# Altium PCB DVT-Atlas-Driver-HT.PcbDoc
Units mm, origin at the board's own origin, x right, y up, seen from the top; angles counter-clockwise.
Board outline 95 x 50 mm, 2 copper layers (Top Layer, Bottom Layer); 36 components, 26 nets, 115 pads, 5 vias.
Unrouted connection lines stored in the file: 20.
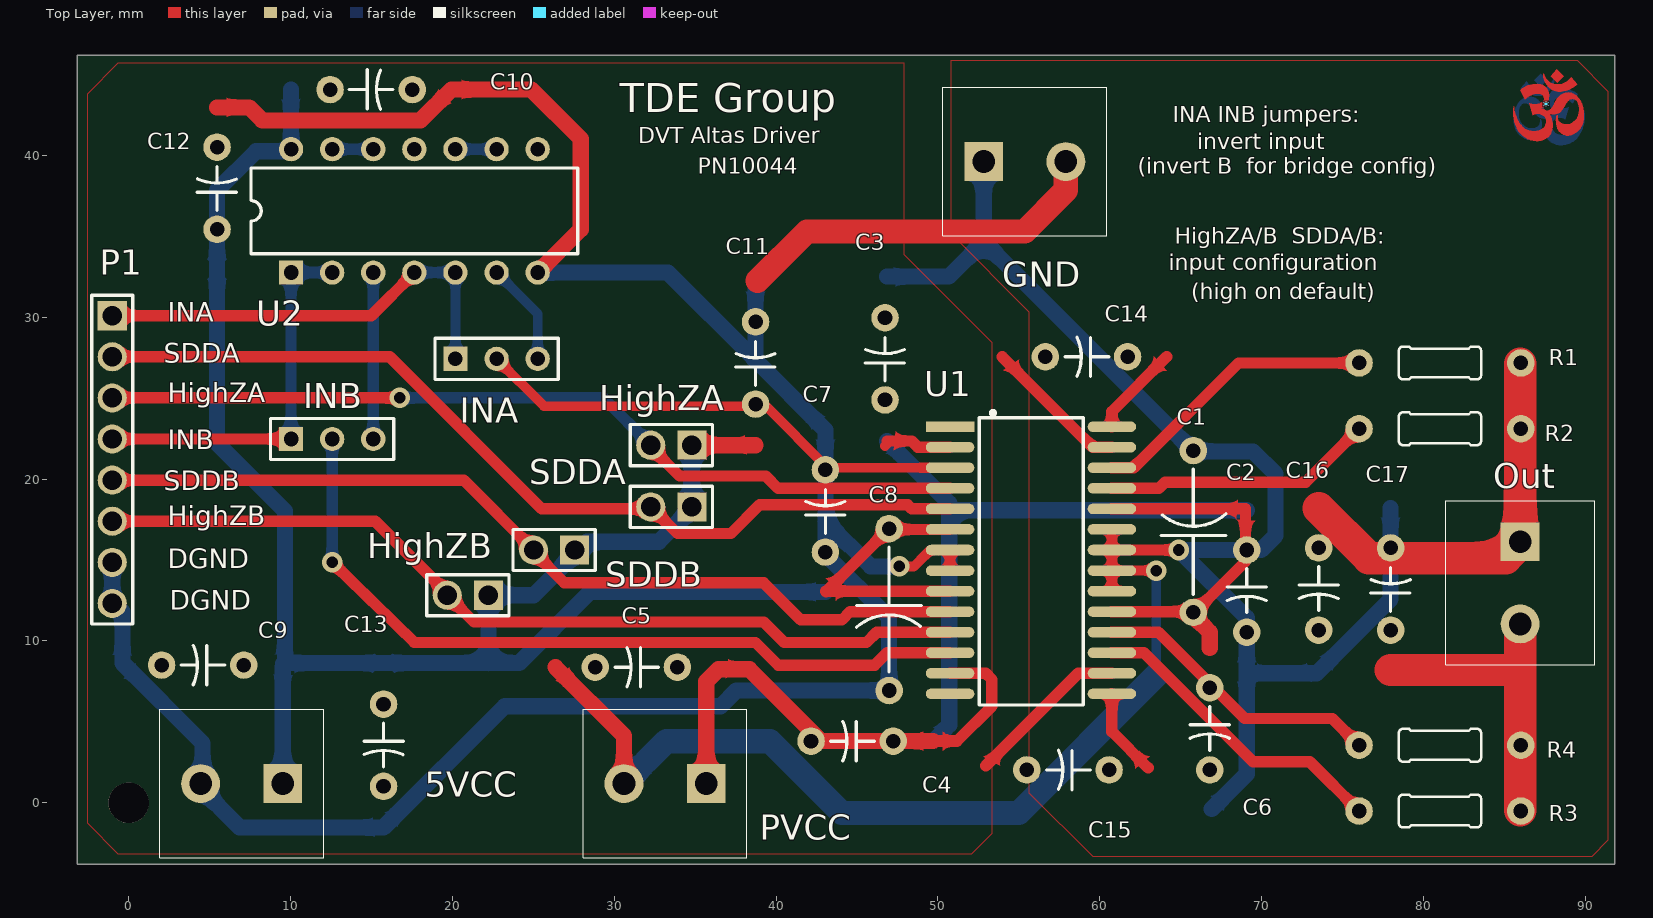
[diagram p0: Top Layer view]
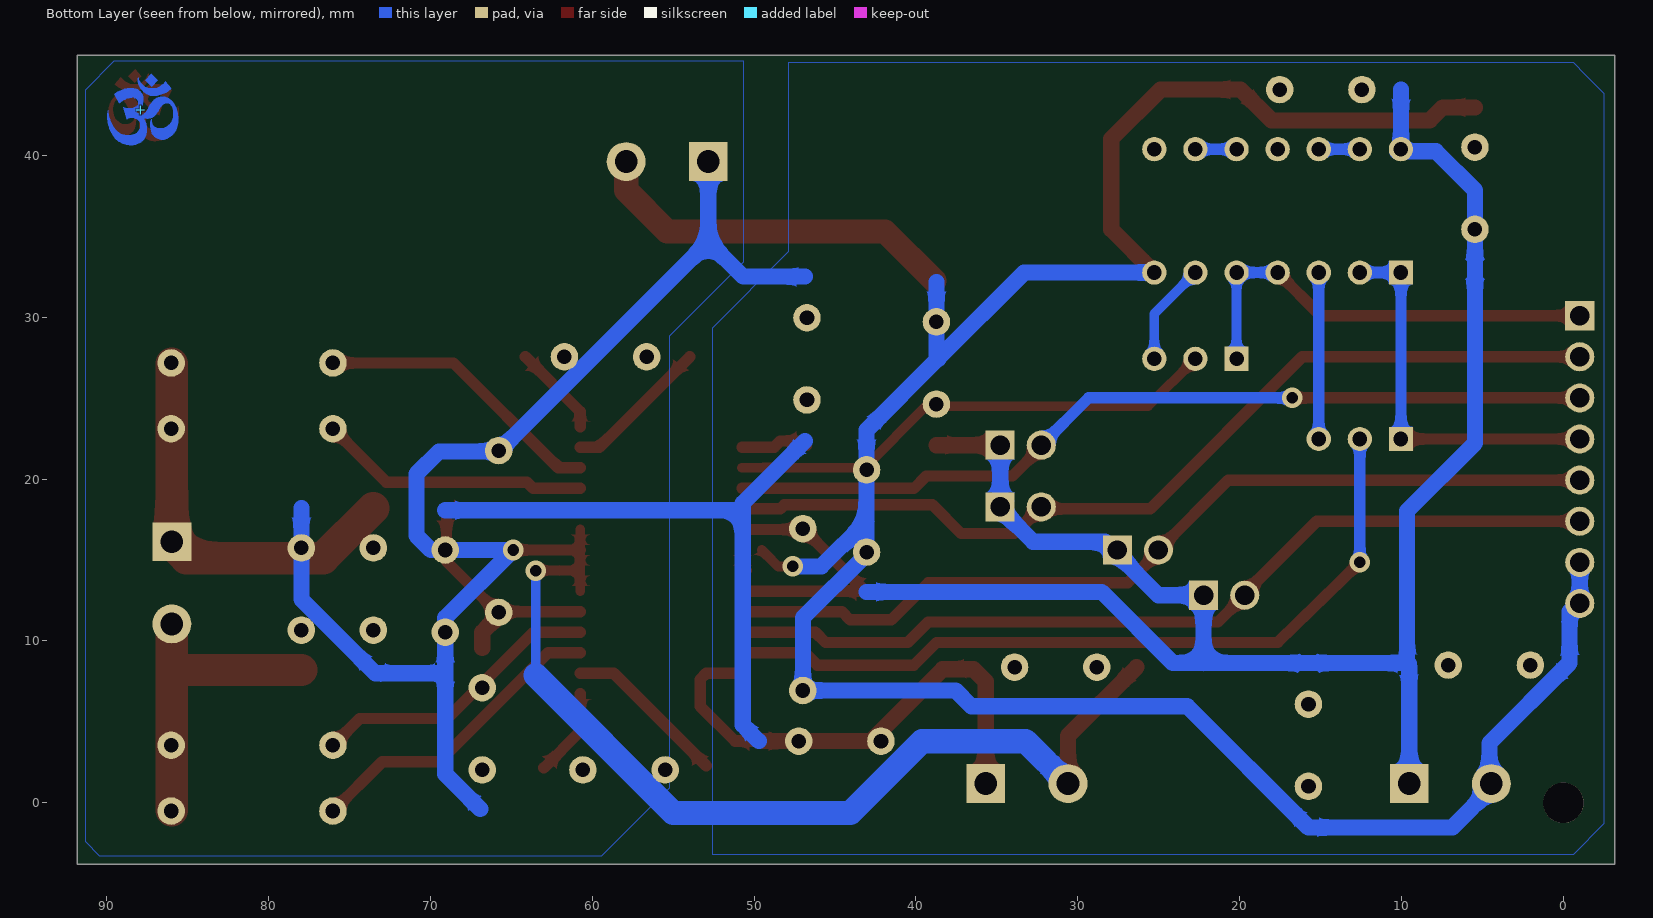
[diagram p1: Bottom Layer view, seen from below]

## Layer stack, top to bottom
Top Solder: solder mask 0.0102, Solder Resist, Dk 3.5
Top Layer: signal copper 0.0356
Dielectric 1: dielectric 0.32, FR-4, Dk 4.8
Bottom Layer: signal copper 0.0356
Bottom Solder: solder mask 0.0102, Solder Resist, Dk 3.5

## Board outline
-3.175,-3.81 91.825,-3.81 91.825,46.19 -3.175,46.19

## Design rules (kind name [scope] priority, off if disabled: settings)
Clearance Polygons [InPolygon] p1: gap=0.254
Clearance [All] p2: gap=0.15
PolygonConnect [All] p1: connectstyle=Relief reliefconductorwidth=0.254 reliefentries=4 polygonreliefangle="90 Angle" airgapwidth=0.254
RoomDefinition DVT-Atlas-Driver2 [InComponentClass('DVT-Atlas-Driver2')] p1: confinementstyle=ConfineIn formatcopy=TRUE lockcomponents=FALSE outline -9.398,-4.826 95.504,-4.826 95.504,52.451 -9.398,52.451
RoomDefinition DVT-Atlas-Driver1 [InComponentClass('DVT-Atlas-Driver1')] p2: confinementstyle=ConfineIn formatcopy=TRUE lockcomponents=FALSE outline -8.763,-6.858 93.853,-6.858 93.853,54.864 -8.763,54.864
RoutingVias [All] p1: holewidth=0.4 width=0.8 viastyle="Through Hole" minholewidth=0.35 minwidth=0.5 maxholewidth=0.711 maxwidth=1.27
SolderMaskExpansion [All] p1: expansion=0.102
Width [All] p1: maxlimit=4 minlimit=0.254 preferedwidth=0.8
30 further rules are at their usual default settings.

## Classes and differential pairs
component class DVT-Atlas-Driver2: C13 INA INB U2
component class DVT-Atlas-Driver1: 5VCC * + C1 C2 C3 C4 C5 C6 C7 C8 C9 C10 C11 C12 C14 C15 C16 C17 GND HighZA HighZB Out P1 PVCC R1 R2 R3 R4 SDDA SDDB U1

## Components (designator, comment, footprint, x,y, rotation, side; value= is the part's Value field where it differs from the comment)
5VCC "PHOENIX_1715721" Phoenix-2-5_08 6.985,1.19 r180 top
* "Om" Om-5mm 87.63,43.053 r0 top
+ "Om" Om-5mm 87.884,42.799 r180 bottom
C1 "Capacitor-Dummy-THT" Dummy-10mm 65.786,16.764 r90 top
C2 "Capacitor-Dummy-THT" KEMET-C052H 69.088,13.081 r270 top
C3 "Capacitor-Dummy-THT" KEMET-C052H 46.736,27.432 r90 top
C4 "Capacitor-Dummy-THT" KEMET-C052H 44.704,3.81 r180 top
C5 "Capacitor-Dummy-THT" KEMET-C052H 31.369,8.382 r180 top
C6 "Capacitor-Dummy-THT" KEMET-C052H 66.802,4.572 r270 top
C7 "Capacitor-Dummy-THT" KEMET-C052H 43.053,18.034 r90 top
C8 "Capacitor-Dummy-THT" Dummy-10mm 46.99,11.938 r270 top
C9 "Capacitor-Dummy-THT" KEMET-C052H 4.572,8.509 r180 top
C10 "Capacitor-Dummy-THT" KEMET-C052H 14.986,44.069 r0 top
C11 "Capacitor-Dummy-THT" KEMET-C052H 38.735,27.178 r90 top
C12 "Capacitor-Dummy-THT" KEMET-C052H 5.461,37.973 r90 top
C13 "Capacitor-Dummy-THT" KEMET-C052H 15.748,3.556 r270 top
C14 "Capacitor-Dummy-THT" KEMET-C052H 59.182,27.559 r180 top
C15 "Capacitor-Dummy-THT" KEMET-C052H 58.039,2.032 r180 top
C16 "Capacitor-Dummy-THT" KEMET-C052H 73.533,13.208 r270 top
C17 "Capacitor-Dummy-THT" KEMET-C052H 77.978,13.208 r90 top
GND "PHOENIX_1715721" Phoenix-2-5_08 55.372,39.624 r0 top
HighZA "Plug_2_180_2.54" HDR1X2 33.528,22.098 r180 top
HighZB "Plug_2_180_2.54" HDR1X2 20.955,12.827 r180 top
INA "Plug_3_90_2.54" HDR1X3 22.733,27.432 r0 top
INB "Plug_3_90_2.54" HDR1X3 12.573,22.479 r0 top
Out "PHOENIX_1715721" Phoenix-2-5_08 85.979,13.589 r270 top
P1 "Plug_08_2.54" HDR1X8_2.54 -1.016,21.209 r270 top
PVCC "PHOENIX_1715721" Phoenix-2-5_08 33.147,1.19 r180 top
R1 "Resistor-Dummy-THT" Dummy-10mm 81.026,27.178 r0 top
R2 "Resistor-Dummy-THT" Dummy-10mm 81.026,23.114 r0 top
R3 "Resistor-Dummy-THT" Dummy-10mm 81.026,-0.508 r0 top
R4 "Resistor-Dummy-THT" Dummy-10mm 81.026,3.556 r0 top
SDDA "Plug_2_180_2.54" HDR1X2 33.528,18.288 r180 top
SDDB "Plug_2_180_2.54" HDR1X2 26.289,15.621 r180 top
U1 "Atlas" SOIC28 55.753,14.986 r0 top
U2 "SN7400N" DIP-14 17.653,36.576 r0 top

## Footprints (in the part's own frame and the unit in brackets; to place one, negate y for a bottom-side part, rotate by r counter-clockwise, add the part's x,y. Pads: shape width x height; smd on the part's side, far side on the other; paste and mask are expansions set on the pad)
DIP-14 [mm] "DIP; 14 Leads; Row Spacing 7.62 mm; Pitch 2.54 mm"
  rect 1.5x1.5 hole 0.9: 1(-7.62,-3.81)
  round 1.5 hole 0.9: 2(-5.08,-3.81) 3(-2.54,-3.81) 4(0,-3.81) 5(2.54,-3.81) 6(5.08,-3.81) 7(7.62,-3.81) 8(7.62,3.81) 9(5.08,3.81) 10(2.54,3.81) 11(0,3.81) 12(-2.54,3.81) 13(-5.08,3.81) 14(-7.62,3.81)
  silkscreen extent -10.1,-2.65 10.1,2.65, body extent -10.02,-2.6 10.09,2.7, height 3
Dummy-10mm [mm] "Dummy-10mm"
  round 1.7 hole 0.9: 1(-5,0) 2(5,0)
  silkscreen extent -3.88,-2.01 3.85,2, body extent -2.39,-0.88 2.41,0.88, height 1.87
HDR1X2 [mm] "Connector; Header; 2 Position"
  rect 1.8x1.8 hole 1.2: 1(-1.27,0)
  round 1.8 hole 1.2: 2(1.27,0)
  silkscreen extent -2.54,-1.27 2.54,1.27, body extent -2.54,-1.27 2.54,1.27, height 8.62
HDR1X3 [mm] "Connector; Header; 3 Position"
  rect 1.5x1.5 hole 0.9: 1(-2.54,0)
  round 1.5 hole 0.9: 2(0,0) 3(2.54,0)
  silkscreen extent -3.81,-1.27 3.81,1.27, body extent -3.81,-1.27 3.81,1.27, height 8.62
HDR1X8_2.54 [mm] "Connector; Header; 8 Position"
  rect 1.8x1.8 hole 1.2: 1(-8.89,0)
  round 1.8 hole 1.2: 2(-6.35,0) 3(-3.81,0) 4(-1.27,0) 5(1.27,0) 6(3.81,0) 7(6.35,0) 8(8.89,0)
  silkscreen extent -10.16,-1.27 10.16,1.27, body extent -10.18,-1.19 10.14,1.35, height 7.27
KEMET-C052H [mm] "KEMET, C052H/C062 Series, THT"
  round 1.7 hole 0.9: 1(-2.54,0) 2(2.54,0)
  silkscreen extent -1.38,-1.21 1.33,1.22, body extent -3.7,-1.33 3.7,1.3, height 8
Om-5mm [mm]
  Top Layer region: 539 vertices and 0 holes, not listed, extent -2.085,-2.163 2.295,1.363
  Top Layer region: 0.625,2.26 1.04,1.845 0.645,1.45 0.255,1.84
  Top Layer region: -0.185,2.025 -0.21,1.935 -0.21,1.78 -0.165,1.59 -0.095,1.43 -0.01,1.31 0.09,1.185 0.18,1.105 0.27,1.03 0.34,0.985 0.445,0.94 0.555,0.905 0.68,0.885 0.77,0.88 0.88,0.885 1.01,0.9 1.185,0.94 1.385,1.01 1.555,1.09 1.665,1.16 1.82,1.285 1.88,1.34 1.51,1.78 1.455,1.715 1.39,1.645 1.29,1.565 1.21,1.51 1.125,1.46 1.005,1.395 0.89,1.36 0.8,1.34 0.72,1.34 0.62,1.34 0.525,1.355 0.42,1.38 0.32,1.415 0.235,1.455 0.165,1.5 0.095,1.56 0.04,1.62 -0.025,1.7 -0.085,1.79 -0.13,1.87 -0.155,1.945
Phoenix-2-5_08 [mm] "Phoenix, 1715721"
  rect 2.4x2.4 hole 1.4: 1(-2.54,0)
  round 2.4 hole 1.4: 2(2.54,0)
  silkscreen extent -5.06,-4.6 5.06,4.6, body extent -5.05,-5.19 5.85,4.61, height 14.2
SOIC28 [mm] "SOIC, 28-Leads, Body 8x18mm, Pitch 1.27mm, IPC High Density"
  rect 3x0.65 smd: 1(-5,8.255)
  oval 3x0.65 smd: 2(-5,6.985) 3(-5,5.715) 4(-5,4.445) 5(-5,3.175) 6(-5,1.905) 7(-5,0.635) 8(-5,-0.635) 9(-5,-1.905) 10(-5,-3.175) 11(-5,-4.445) 12(-5,-5.715) 13(-5,-6.985) 14(-5,-8.255) 15(5,-8.255) 16(5,-6.985) 17(5,-5.715) 18(5,-4.445) 19(5,-3.175) 20(5,-1.905) 21(5,-0.635) 22(5,0.635) 23(5,1.905) 24(5,3.175) 25(5,4.445) 26(5,5.715) 27(5,6.985) 28(5,8.255)
  silkscreen extent -3.2,-8.95 3.23,9.23, body extent -3.59,-8.98 3.65,8.81, height 1.91

## Part data
5VCC GND Out PVCC: library part 2Pol_1715721, "Phoenix, 2 pol, 5.08mm, 22A, 715721"
HighZA HighZB SDDA SDDB: "Plug, 2-Pin"
INA INB: "Plug,-3-Pin"
P1: "Plug, 08-Pin"
U1: library part CHT_TIT3345E_CSOIC28_T, "Gate driver, 30V, HT"
U2: "Quad NAND, TTL"

## Free pads (board coordinates)
  round 2.5 hole 2.5 unplated: 2(0,0)

## Via types
v1: diameter 1.27, hole 0.711, Top Layer to Bottom Layer, 5 vias

## Nets (pads, with @x,y where several pads share a name; then routed paths per layer and width w, separated by ;. In a path a pad name is that pad's centre, name@x,y a point inside that pad or via, vN(x,y) a via of type N, cw(c..) or ccw(c..) an arc to the next point about the centre after c; other vN are vias at no path point)
5VCC: 5VCC.1 C7.1 C8.1 C9.1 C10.1 C11.1 C12.1 C13.1 HighZA.1 HighZB.1 SDDA.1 SDDB.1 U1.6 U1.9 U2.14 | length 127.2
  Top Layer w0.6: 43.053,13.034 43.086,13.034
  Top Layer w0.7: 43.053,13.081 43.133,13.081 ; 43.086,13.034 43.133,13.081 ; C8.1 43.133,13.081 ; C8.1@47.037,16.891 U1.6 ; U1.9 43.133,13.081
  Top Layer w1: HighZA.1 38.735,22.098
  Bottom Layer w0.7: 9.398,8.636 9.652,8.636
  Bottom Layer w1: 5VCC.1 9.525,8.382 9.612,8.469 ; 10.033,44.069 10.033,40.513 10.287,40.259 7.874,40.259 5.461,37.846 5.461,22.225 9.652,18.034 9.652,8.636 24.13,8.636 28.528,13.034 43.053,13.034 ; 22.225,8.636 HighZB.1 25.019,12.827 28.321,16.129 32.766,16.129 SDDA.1@34.671,18.034 ; HighZA.1 SDDA.1 SDDA.1@34.925,18.161
A-GND: C1.2 C2.2 C3.2 C4.2 C5.2 C6.2 C16.2 C17.2 GND.1 PVCC.2 U1.20 U1.21 U1.22 U1.23 | length 146.5
  Top Layer w0.6: U1.20 U1.21 ; U1.23 U1.22 U1.21 ; v1(63.5,14.351) U1.21
  Top Layer w0.7: U1.22 v1(64.897,15.621)
  Top Layer w1: 26.369,8.382 30.607,4.144 PVCC.2 PVCC.2@30.607,1.143
  Bottom Layer w0.6: 63.5,7.874 v1(63.5,14.351)
  Bottom Layer w1: 46.863,32.512 50.673,32.512 52.832,34.671 ; GND.1 52.832,34.671 ; 66.929,-0.381 69.088,1.778 69.088,8.001 ; 77.978,18.208 77.978,12.573 73.406,8.001 69.088,8.001 ; 52.832,34.671 65.786,21.717 69.469,21.717 70.866,20.32 70.866,16.51 69.977,15.621 v1(64.897,15.621) 69.088,11.43 69.088,8.081 69.088,8.001
  Bottom Layer w1.5: PVCC.2 33.227,3.81 39.624,3.81 44.069,-0.635 54.991,-0.635 63.5,7.874
D-GND: 5VCC.2 C7.2 C8.2 C9.2 C10.2 C11.2 C12.2 C13.2 GND.2 P1.7 P1.8 pad.2 U1.7 U1.8 U2.7 | length 175
  Top Layer w0.6: v1(47.625,14.605) 48.514,14.605 U1.7@49.53,15.621 ; U1.8@50.419,14.351 U1.8 U1.7
  Top Layer w1: 5.461,42.973 7.446,42.973 8.255,42.164 18.034,42.164 19.939,44.069 ; 20.066,44.069 24.892,44.069 27.94,41.021 27.94,35.433 U2.7
  Top Layer w1.5: 38.862,32.258 41.91,35.306 55.372,35.306 57.912,37.846 GND.2
  Bottom Layer w1: P1.7 -1.016,12.446 -0.381,11.811 -0.381,8.636 4.572,3.683 4.572,1.016 4.445,1.143 5VCC.2@4.318,1.143 ; 5VCC.2@4.318,1.016 6.858,-1.524 15.748,-1.524 23.241,5.969 36.576,5.969 37.545,6.938 C8.2 46.99,11.43 43.053,15.367 43.053,17.399 ; U2.7 33.321,32.766 38.655,27.432 ; 38.608,27.432 38.655,27.432 ; 38.735,32.178 38.735,27.432 38.655,27.432 ; v1(47.625,14.605) 45.847,14.605 43.053,17.399 ; 38.655,27.432 43.053,23.034 43.053,17.399
NetC14_1: C14.1 U1.28 | length 5.7
  Top Layer w0.7: U1.28 60.753,24.177 64.135,27.559
NetC14_2: C14.2 U1.27 | length 9.1
  Top Layer w0.7: 53.975,27.559 59.563,21.971 U1.27
NetC15_1: C15.1 U1.15 | length 5.5
  Top Layer w0.7: U1.15 60.753,4.398 62.992,2.159
NetC15_2: C15.2 U1.16 | length 10.2
  Top Layer w0.7: 52.959,2.286 58.674,8.001 U1.16
NetC16_1: C16.1 Out.1 R1.2 R2.2 | length 25.3
  Top Layer w0.6: R1.2@85.979,27.131 R1.2
  Top Layer w2: 73.533,18.208 76.628,15.113 85.09,15.113 Out.1@86.106,16.129 ; Out.1 R1.2@85.979,27.131
NetC17_1: C17.1 Out.2 R3.2 R4.2 | length 19.5
  Top Layer w0.6: R3.2@85.979,-0.461 R3.2
  Top Layer w2: 77.978,8.208 85.932,8.208 ; R3.2@85.979,-0.461 Out.2
NetHighZA_2: HighZA.2 P1.3 U1.4 | length 54.2
  Top Layer w0.7: P1.3 v1(16.764,25.019) ; HighZA.2@32.131,22.098 34.036,20.193 39.37,20.193 40.132,19.431 U1.4
  Bottom Layer w0.7: v1(16.764,25.019) 29.337,25.019 HighZA.2
NetHighZB_2: HighZB.2 P1.6 U1.11 | length 55.3
  Top Layer w0.7: P1.6 15.24,17.399 HighZB.2@19.812,12.827 ; HighZB.2 21.336,11.176 39.243,11.176 40.513,9.906 45.593,9.906 46.228,10.541 U1.11
NetINA_1: INA.1 P1.1 U2.4 U2.5 | length 27.7
  Top Layer w0.7: P1.1 14.986,30.099 U2.4
  Bottom Layer w0.6: INA.1 20.193,32.639 U2.5@20.32,32.766
  Bottom Layer w0.7: U2.4 U2.5
NetINA_2: INA.2 U1.3 | length 30.8
  Top Layer w0.6: INA.2 25.654,24.511 39.37,24.511 43.18,20.701 U1.3
NetINA_3: INA.3 U2.6 | length 6.4
  Bottom Layer w0.6: U2.6 25.273,30.226 INA.3
NetINB_1: INB.1 P1.4 U2.1 U2.2 | length 23.7
  Top Layer w0.7: P1.4 INB.1
  Bottom Layer w0.7: INB.1 U2.1@10.033,32.639 ; U2.1 U2.2
NetINB_2: INB.2 U1.12 | length 48.6
  Top Layer w0.7: v1(12.573,14.859) 17.653,9.906 38.735,9.906 40.132,8.509 46.101,8.509 46.863,9.271 U1.12
  Bottom Layer w0.7: v1(12.573,14.859) INB.2@12.573,22.352
NetINB_3: INB.3 U2.3 | length 10.3
  Bottom Layer w0.7: INB.3 U2.3
NetP1_2: P1.2 SDDA.2 U1.5 | length 57
  Top Layer w0.7: P1.2 16.129,27.559 25.527,18.161 SDDA.2@32.258,18.161 ; SDDA.2@32.385,18.161 33.909,16.637 37.211,16.637 38.989,18.415 48.133,18.415 48.387,18.161 U1.5
NetP1_5: P1.5 SDDB.2 U1.10 | length 55.7
  Top Layer w0.7: P1.5 20.701,19.939 SDDB.2 ; SDDB.2@24.892,15.621 26.924,13.589 39.243,13.589 41.529,11.303 44.069,11.303 44.577,11.811 U1.10
NetR1_1: R1.1 U1.26 | length 18
  Top Layer w0.7: U1.26 62.103,20.701 68.58,27.178 R1.1
NetR2_1: R2.1 U1.25 | length 16.8
  Top Layer w0.7: U1.25 63.651,19.431 64.032,19.812 72.724,19.812 R2.1
NetR3_1: R3.1 U1.17 | length 19.3
  Top Layer w0.7: U1.17 62.738,9.271 69.469,2.54 72.978,2.54 R3.1
NetR4_1: R4.1 U1.18 | length 18.2
  Top Layer w0.7: U1.18 63.627,10.541 68.961,5.207 74.375,5.207 R4.1
NetU2_9: U2.9 U2.10 | length 2.4
  Bottom Layer w0.7: U2.10 U2.9@22.606,40.386
NetU2_12: U2.12 U2.13 | length 2.5
  Bottom Layer w0.7: U2.13 U2.12
PVCC: C1.1 C2.1 C3.1 C4.1 C5.1 C6.1 PVCC.1 U1.2 U1.13 U1.19 U1.24 | length 97.9
  Top Layer w0.6: 46.736,22.051 46.91,22.225
  Top Layer w0.7: 46.863,22.352 48.387,22.352 48.768,21.971 U1.2 ; 49.704,3.81 51.181,3.81 53.34,5.969 53.34,7.62 52.959,8.001 U1.13 ; U1.19 65.913,11.811 69.008,14.906 69.008,18.161 U1.24
  Top Layer w1: PVCC.1 35.687,7.493 36.322,8.128 ; 36.449,8.255 38.354,8.255 42.799,3.81 49.704,3.81 ; C1.1@65.786,11.557 66.802,10.541 66.802,9.572
  Bottom Layer w1: 46.863,22.352 50.706,18.509 50.706,18.081 ; 49.704,3.81 50.706,4.812 50.706,18.081 ; 69.088,18.081 50.706,18.081
pads on no net: U1.1 U1.14 U2.8 U2.11

## Polygon pours and split planes (outlines as drawn)
A-GND on Bottom Layer "A-GND" (solid, shelved, pour order 0): 50.673,45.847 50.673,33.401 55.245,28.829 55.245,0.889 59.436,-3.302 90.424,-3.302 91.313,-2.413 91.313,44.069 89.535,45.847
D-GND on Bottom Layer "D-GND" (solid, shelved, pour order 4): 47.879,45.72 47.879,34.036 52.578,29.337 52.578,-3.175 -0.635,-3.175 -2.54,-1.27 -2.54,43.815 -1.397,44.958 -0.635,45.72
D-GND on Top Layer "DGND" (solid, shelved, pour order 8): 47.879,45.72 47.879,33.909 53.34,28.448 53.34,-1.905 52.07,-3.175 -0.635,-3.175 -2.54,-1.27 -2.54,43.815 -0.635,45.72
A-GND on Top Layer "AGND" (solid, shelved, pour order 10): 50.8,45.847 50.8,35.179 55.626,30.353 55.626,0.635 59.563,-3.302 90.424,-3.302 91.44,-2.286 91.44,43.942 89.535,45.847

## Silkscreen, mask and mechanical layers (free items; w line width, h text height)
Top Overlay:
  text "TDE Group" at 30.353,42.672 h1.8
  text "INA INB jumpers:" at 64.516,42.037 h1
  text "DVT Altas Driver" at 31.496,40.767 h1
  text "invert input" at 66.04,40.386 h1
  text "PN10044" at 35.179,38.862 h1
  text "(invert B  for bridge config)" at 62.357,38.862 h1
  text "HighZA/B  SDDA/B:" at 64.643,34.544 h1
  text "input configuration" at 64.262,32.893 h1
  text "(high on default)" at 65.659,31.115 h1
  text "INA" at 2.413,29.718 h1.2
  text "SDDA" at 2.159,27.178 h1.2
  text "HighZA" at 2.413,24.765 h1.2
  text "INB" at 2.413,21.844 h1.2
  text "SDDB" at 2.159,19.304 h1.2
  text "HighZB" at 2.413,17.145 h1.2
  text "DGND" at 2.413,14.478 h1.2
  text "DGND" at 2.54,11.938 h1.2
Outline:
  the board outline again, w0.3

## Dimensions
91.825,-3.81 to 91.825,46.19 on Mechanical 16
91.825,-3.81 to -3.175,-3.81 on Mechanical 16